# EAGLE board Logic (EAGLE 7.1.0)
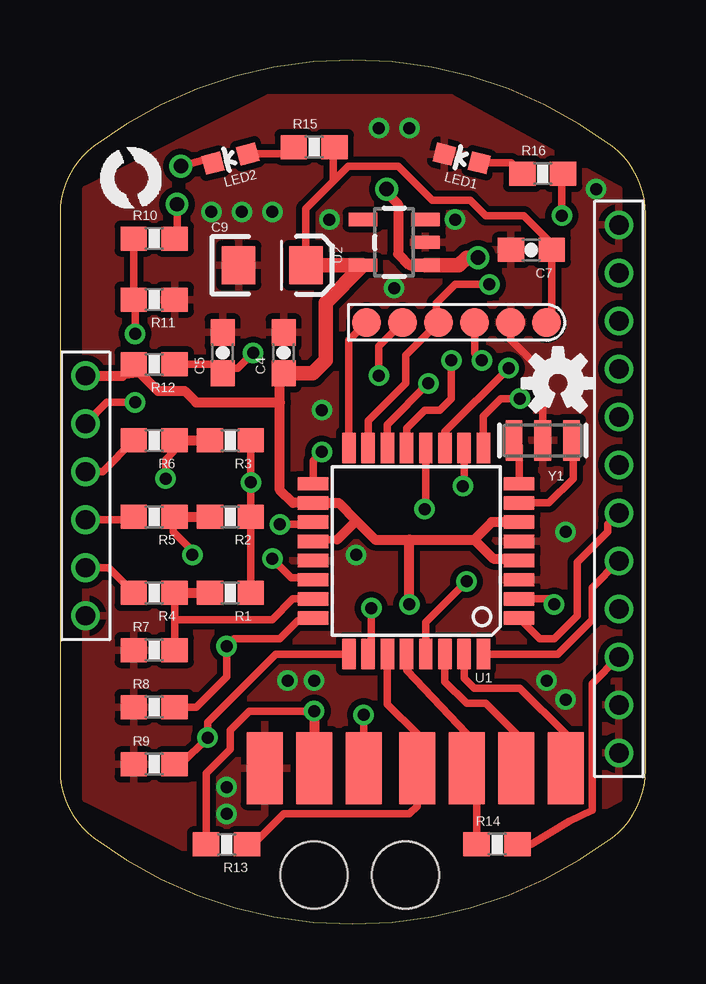
[diagram p0: board, top side]
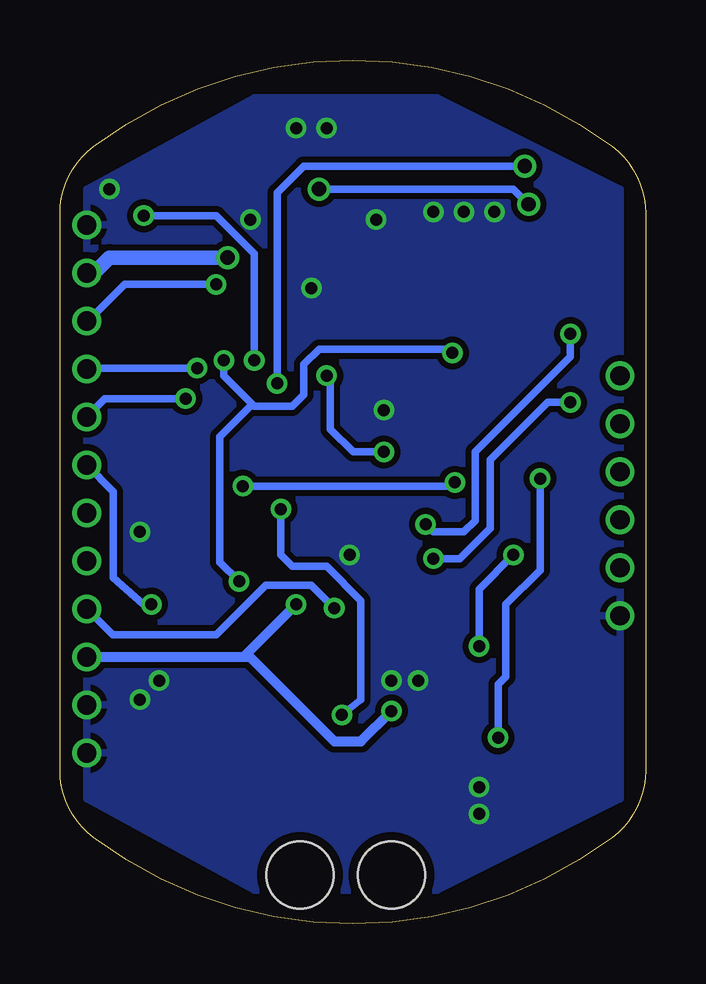
[diagram p1: board, bottom side, seen from below]

Size 24.4 x 36 mm. Coordinates in mm from the lower left corner, seen from the top.
Outline: 23,32.4 arc74 1.4,32.4 arc53 0,29.6 0,6.4 arc53 1.4,3.6 arc74 23,3.6 arc53 24.4,6.4 24.4,29.6 arc53 23,32.4
Copper layers (1*16): Top 0.0356mm / dielectric 1.5011mm / Bottom 0.0356mm
Design rules "OSH-Park": minimum track width 6mil, minimum drill 13mil, track to track 6mil, track to pad 6mil, pad to pad 6mil, via to via 6mil, smd to smd 6mil, copper to edge 15mil, drill to drill 6mil, minimum pad ring 7mil, minimum via ring 7mil, stop-mask expansion 3mil, vias tented up to drill 0mil, thermal gap 10mil
Holes 2.8 mm at 10.59,2.05 14.4,2.05

## Footprints (pad centres in the part's own frame; a part is rotated, then mirrored left to right if it is on the bottom)
0603-CAP = smd 1.1 x 1: 1 -0.85,0; 2 0.85,0
EIA3216 = smd 1.4 x 1.6: A 1.4,0; C -1.4,0
LED-0603 = smd 0.8 x 0.8: A 0,-0.75; C 0,0.75
0603-RES = smd 1.1 x 1: 1 -0.85,0; 2 0.85,0
TQFP32-08 = smd 1.27 x 0.559: 1 -4.293,2.8; 2 -4.293,2; 3 -4.293,1.2; 4 -4.293,0.4; 5 -4.293,-0.4; 6 -4.293,-1.2; 7 -4.293,-2; 8 -4.293,-2.8; 17 4.293,-2.8; 18 4.293,-2; 19 4.293,-1.2; 20 4.293,-0.4; 21 4.293,0.4; 22 4.293,1.2; 23 4.293,2; 24 4.293,2.8 | smd 0.559 x 1.27: 9 -2.8,-4.293; 10 -2,-4.293; 11 -1.2,-4.293; 12 -0.4,-4.293; 13 0.4,-4.293; 14 1.2,-4.293; 15 2,-4.293; 16 2.8,-4.293; 25 2.8,4.293; 26 2,4.293; 27 1.2,4.293; 28 0.4,4.293; 29 -0.4,4.293; 30 -1.2,4.293; 31 -2,4.293; 32 -2.8,4.293
SOT23-5 = smd 0.55 x 1.2: 1 -0.95,-1.3; 2 0,-1.3; 3 0.95,-1.3; 4 0.95,1.3; 5 -0.95,1.3
PAD-1.5X3MM = smd 3 x 1.5: P$1 0,0
AVR-ISP-TINY = smd 1.2 x 1.2: GND 1.5,0; MISO 7.5,0; MOSI 4.5,0; RESET 3,0; SCK 6,0; VCC 0,0
HEADER-2MM-6POS = drill 0.8: P$1 0,0; P$2 2,0; P$3 4,0; P$4 6,0; P$5 8,0; P$6 10,0
HEADER-2MM-12POS = drill 0.8: P$1 0,0; P$2 2,0; P$3 4,0; P$4 6,0; P$5 8,0; P$6 10,0; P$7 12,0; P$8 14,0; P$9 16,0; P$10 18,0; P$11 20,0; P$12 22,0
RESONATOR-SMD = smd 0.7 x 1.7: 1 -1.2,0; 2 0,0; 3 1.2,0

## Placement (x,y rotation side)
C4  0.1uF  [0603-CAP]  9.32,23.8 90 top
C5  0.1uF  [0603-CAP]  6.78,23.8 90 top
C7  0.1uF  [0603-CAP]  19.64,28.08 180 top
C9  1uF  [EIA3216]  8.85,27.45 0 top
LED1  RED  [LED-0603]  16.74,31.9 76 top
LED2  BLUE  [LED-0603]  7.1,31.89 105 top
LOGO1  OSHW-LOGOS  [OSHW-LOGO-S]  20.75,22.53 0 top
R1  47K  [0603-RES]  7.1,13.8 180 top
R2  47K  [0603-RES]  7.1,16.97 180 top
R3  47K  [0603-RES]  7.1,20.15 180 top
R4  47K  [0603-RES]  3.92,13.8 180 top
R5  47K  [0603-RES]  3.92,16.97 180 top
R6  47K  [0603-RES]  3.92,20.15 180 top
R7  4.7K  [0603-RES]  3.92,11.41 0 top
R8  4.7K  [0603-RES]  3.92,9.03 0 top
R9  4.7K  [0603-RES]  3.92,6.65 0 top
R10  18K 1%  [0603-RES]  3.92,28.56 0 top
R11  3.3K 1%  [0603-RES]  3.92,26.02 180 top
R12  10K  [0603-RES]  3.92,23.32 180 top
R13  10K  [0603-RES]  6.94,3.32 180 top
R14  10K  [0603-RES]  18.21,3.32 0 top
R15  330  [0603-RES]  10.59,32.37 0 top
R16  330  [0603-RES]  20.12,31.26 0 top
U1  ATMEGA168  [TQFP32-08]  14.84,15.54 180 top
U2  V_REG_LDOSMD  [SOT23-5]  13.92,28.4 90 top
U$3  PAD1.5X3MM  [PAD-1.5X3MM]  8.53,6.49 90 top
U$4  LOGOBR-LOGO-S  [BR-LOGO-SMALL]  1.7,29.83 0 top
U$8  PAD1.5X3MM  [PAD-1.5X3MM]  10.59,6.49 90 top
U$9  PAD1.5X3MM  [PAD-1.5X3MM]  14.88,6.49 90 top
U$10  PAD1.5X3MM  [PAD-1.5X3MM]  16.94,6.49 90 top
U$11  PAD1.5X3MM  [PAD-1.5X3MM]  12.65,6.49 90 top
U$12  PAD1.5X3MM  [PAD-1.5X3MM]  19.01,6.49 90 top
U$13  PAD1.5X3MM  [PAD-1.5X3MM]  21.07,6.49 90 top
U$14  AVR-ISPTINY-SMD  [AVR-ISP-TINY]  20.27,25.07 180 top
U$16  HEADER-62MM  [HEADER-2MM-6POS]  1.07,12.84 90 top
U$17  HEADER-122MM  [HEADER-2MM-12POS]  23.29,7.13 90 top
Y1  RESONATORSMD  [RESONATOR-SMD]  20.12,20.15 180 top

## Library data of the parts
C4 C5 C7 C9 = SparkFun-Capacitors
LED1 LED2 R15 R16 Y1 = SparkFun
LOGO1 = SparkFun-Aesthetics
R1-R14 = SparkFun-Resistors
U1 = SparkFun-DigitalIC
U2 = SparkFun-PowerIC
U$3 U$4 U$8-U$14 U$16 U$17 = BR-Eagle-Library

## Nets
CENTER: R1.1 R2.1 R3.1 U1.10
CURRENT_ADC: U1.26 U$17.P$4
GND: C4.2 C5.2 C7.2 C9.C LED1.C R7.1 R8.1 R9.1 R11.1 U1.3 U1.5 U1.21 U2.2 U$3.P$1 U$14.GND U$16.P$1 U$17.P$1 U$17.P$2 U$17.P$12 Y1.2
LED_STATUS: LED2.C U1.14
LED_WARN: R16.2 U1.13
MISO: U1.16 U$14.MISO
N$3: LED1.A R16.1
N$10: U1.7 Y1.1
N$11: U1.8 Y1.3
N$16: LED2.A R15.1
PHASE_A: R4.2 U$16.P$2
PHASE_B: R5.2 U$16.P$3
PHASE_C: R6.2 U$16.P$4
PWM: U1.12 U$11.P$1
PWM_AH: U1.32 U$17.P$5
PWM_AL: U1.1 U$17.P$6
PWM_BH: U1.2 U$17.P$7
PWM_BL: U1.9 U$17.P$8
PWM_CH: U1.11 U$17.P$9
PWM_CL: U1.15 U$14.MOSI U$17.P$10
RESET: C5.1 R12.1 U1.29 U$14.RESET
RX: U1.30 U$12.P$1
SCK: U1.17 U$14.SCK
SCL: R14.1 U1.28 U$10.P$1
SDA: R13.1 U1.27 U$9.P$1
SENSE_A: R1.2 R4.1 R7.2 U1.23
SENSE_B: R2.2 R5.1 R8.2 U1.24
SENSE_C: R3.2 R6.1 R9.2 U1.25
TEMP_ADC: U1.22 U$16.P$5
TX: U1.31 U$13.P$1
VBAT: R10.2 U2.1 U$17.P$11
VBAT_ADC: R10.1 R11.2 U1.19
VCC5V: C4.1 C7.1 C9.A R12.2 R13.2 R14.2 R15.2 U1.4 U1.6 U1.18 U1.20 U2.5 U$8.P$1 U$14.VCC U$16.P$6 U$17.P$3

## Tracks (layer width: path | path; a pad name or v marks a point on that pad's centre or on a via)
CENTER  (via drill 0.5)
  Top 0.305: R1.1 R2.1 v7.95,18.4 7.95,18.88 R3.1 | U1.10 16.84,18.3 v16.78,18.24
  Bottom 0.305: v16.78,18.24 8.11,18.24 v7.95,18.4
CURRENT_ADC  (via drill 0.5)
  Top 0.305: v12.97,13.16 12.97,11.38 U1.26
  Bottom 0.305: 13.01,13.13 v12.97,13.16 13.93,14.11 15.83,14.11 17.89,12.05 22.21,12.05 U$17.P$4
GND  (via drill 0.5)
  Top 0.305: U$14.GND 18.78,24.34 20.12,23 Y1.2
  other vias: 12.34,15.38 21.07,16.34 20.27,10.14 21.07,9.35 8.85,29.67 7.58,29.67 6.3,29.67 13.29,33.16 14.56,33.16 13.92,26.5 11.23,29.35 10.59,10.14 9.48,10.14 22.34,30.62 10.91,21.42 6.94,5.7 6.94,4.59 16.46,29.35
  pour Top (isolate 0.254): 1.07,5.22 1.07,30.62 8.69,34.43 16.31,34.43 23.29,30.62 23.29,5.22 16.31,1.41 8.69,1.41
  pour Bottom (isolate 0.254): 1.07,5.22 1.07,30.62 8.69,34.43 16.31,34.43 23.29,30.62 23.29,5.22 16.31,1.41 8.69,1.41
LED_STATUS  (via drill 0.5, 0.6)
  Top 0.305: U1.14 13.64,20.81 v15.35,22.53 | v5.04,31.58 6.18,31.89 LED2.C
  Bottom 0.305: v15.35,22.53 15.35,30.46 14.24,31.58 v5.04,31.58
LED_WARN  (via drill 0.5)
  Top 0.305: U1.13 14.44,20.66 15.2,21.42 15.83,21.42 16.31,21.89 v16.31,23.48 | v20.91,29.51 20.91,31.2 R16.2
  Bottom 0.305: v16.31,23.48 16.31,27.92 17.89,29.51 v20.91,29.51
MISO
  Top 0.305: U1.16 12.04,24.33 U$14.MISO
N$3
  Top 0.305: LED1.A 18.81,31.72 R16.1
N$10
  Top 0.305: U1.7 20.37,17.54 21.39,18.56 21.39,20.08 Y1.1
N$11
  Top 0.305: U1.8 19.13,19.93 Y1.3
N$16
  Top 0.305: LED2.A 9.46,32.09 R15.1
PHASE_A
  Top 0.305: U$16.P$2 2.03,14.84 R4.2
PHASE_B
  Top 0.305: U$16.P$3 2.95,16.84
  Top 0.406: 2.95,16.84 R5.2
PHASE_C
  Top 0.305: U$16.P$4 1.77,18.84 R6.2
PWM  (via drill 0.5)
  Top 0.305: U1.12 15.24,17.33 v15.2,17.29 | v12.66,8.72 U$11.P$1
  Bottom 0.305: v15.2,17.29 15.2,15.38 14.72,14.91 13.29,14.91 11.86,13.48 11.86,9.35 v12.66,8.72
PWM_AH
  Top 0.305: U1.32 20.75,11.25 22.18,12.68 22.18,14.02 U$17.P$5
PWM_AL
  Top 0.305: U$17.P$6 22.82,16.65 22.82,16.34 21.55,15.07 21.55,12.84 20.59,11.89 19.98,11.89 U1.1
PWM_BH  (via drill 0.5)
  Top 0.305: U1.2 20.5,13.54 v20.59,13.32
  Bottom 0.305: v20.59,13.32 20.75,13.16 22.18,14.43 22.18,18.02 U$17.P$7
PWM_BL  (via drill 0.5)
  Top 0.305: U1.9 17.64,21.16 18.37,21.89 v19.16,21.89
  Bottom 0.305: v19.16,21.89 22.53,21.89 U$17.P$8
PWM_CH  (via drill 0.5)
  Top 0.305: U1.11 16.04,20.51 v18.69,23.16
  Bottom 0.305: v18.69,23.16 23.01,23.16 U$17.P$9
PWM_CL  (via drill 0.5)
  Top 0.305: U1.15 12.84,20.96 14.4,22.53 14.4,23.69 U$14.MOSI 15.67,25.17 15.67,25.86 16.47,26.65 v17.89,26.65
  Bottom 0.305: U$17.P$10 23.23,25.13 21.7,26.65 v17.89,26.65
RESET  (via drill 0.5)
  Top 0.305: R12.1 6.41,23.32 C5.1 7,23.16 7.42,23.16 v8.05,23.8 | U$14.RESET 17.28,23.78 v17.58,23.48 | U1.29 15.24,12.57 v16.94,14.27
  Bottom 0.305: v17.58,23.48 17.58,22.84 16.39,21.65 | 16.39,21.65 16.31,21.57 14.72,21.57 14.24,22.05 14.24,23.32 13.61,23.96 8.21,23.96 v8.05,23.8 | v16.94,14.27 17.74,15.07 17.74,20.3 16.39,21.65
RX
  Top 0.305: U1.30 16.04,10.09 16.94,9.19 17.74,9.19 19.01,7.92 U$12.P$1
SCK  (via drill 0.5)
  Top 0.305: U1.17 10.55,19.31 v10.91,19.67 | v13.29,22.84 13.29,24.08 U$14.SCK
  Bottom 0.305: v10.91,19.67 12.18,19.67 13.13,20.62 13.13,22.69 v13.29,22.84
SCL
  Top 0.305: U1.28 14.44,10.58 16.94,7.92 U$10.P$1 17.36,6.07 R14.1
SDA
  Top 0.305: U1.27 13.64,9.16 14.88,7.92 U$9.P$1 14.88,4.91 14.56,4.59 9.32,4.59 8.05,3.32 R13.1
SENSE_A
  Top 0.305: R7.2 4.77,12.68 | 4.77,12.68 R4.1 | U1.23 9.7,13.54 8.85,12.68 4.77,12.68
  Top 0.406: R4.1 R1.2
SENSE_B  (via drill 0.5)
  Top 0.305: R8.2 5.67,9.03 6.94,10.3 v6.94,11.57 7.26,11.89 9.16,11.89 9.91,12.64 U1.24 | v5.51,15.38 5.51,15.54 4.72,16.34 4.72,16.91 R5.1
  Top 0.406: R5.1 R2.2
  Bottom 0.305: v6.94,11.57 6.94,13.95 v5.51,15.38
SENSE_C  (via drill 0.5)
  Top 0.305: 5.04,6.65 v6.15,7.76 6.15,8.4 9,11.25 U1.25 | v4.4,18.56 4.4,19.35 4.72,19.67 4.72,20.09 R6.1
  Top 0.406: R6.1 R3.2 | R9.2 5.04,6.65
  Bottom 0.305: v6.15,7.76 6.15,9.99 5.83,10.3 5.83,13.32 4.4,14.75 v4.4,18.56
TEMP_ADC  (via drill 0.5)
  Top 0.305: v8.85,15.22 9.64,14.43 10.46,14.43 U1.22 | v3.13,21.73 1.96,21.73 U$16.P$5
  Bottom 0.305: v8.85,15.22 7.73,15.22 6.46,16.49 6.46,19.35 4.08,21.73 v3.13,21.73
TX
  Top 0.305: U1.31 16.84,10.25 17.26,9.83 19.16,9.83 21.07,7.92 U$13.P$1
VBAT  (via drill 0.6)
  Top 0.305: v4.88,29.99 4.88,28.66 R10.2
  Top 0.406: v13.61,30.62 13.61,30.46 14.08,29.99 14.08,27.92 14.56,27.45 U2.1
  Top 0.61: v17.42,27.77 16.94,27.77 16.62,27.45 U2.1
  Bottom 0.305: v13.61,30.62 5.51,30.62 v4.88,29.99
  Bottom 0.61: U$17.P$11 22.98,27.13 22.34,27.77 v17.42,27.77
VBAT_ADC  (via drill 0.5)
  Top 0.305: v9.16,16.65 10.46,16.65 U1.19 | R10.1 R11.2 3.13,25.96 v3.13,24.59
  Bottom 0.305: v9.16,16.65 8.85,16.34 7.58,16.34 7.1,16.81 7.1,19.67 3.13,23.64 v3.13,24.59
VCC5V  (via drill 0.5)
  Top 0.305: U$14.VCC 20.49,25.28 C7.1 20.49,28.34 19.32,29.51 17.74,29.51 17.1,30.15 15.51,30.15 14.08,31.58 12.02,31.58 11.39,30.94 | 9.16,22.79 C4.1 | 2.6,22.84 3.34,22.95 R12.2 | 11.54,16.02 10.62,16.02 U1.20 | 19.05,15.22 U1.4 | C9.A 10.25,29.8 11.39,30.94 | 11.39,30.94 11.39,32.31 R15.2 | R14.2 19.64,3.32 21.23,4.27 22.18,4.75 22.18,10.02 U$17.P$3 | R13.2 6.09,6.28 7.1,7.29 7.1,8.08 7.89,8.87 v10.59,8.87
  Top 0.406: 9.16,21.73 9.16,18.08 9.7,17.54 U1.18 11.61,17.54 12.34,16.81 | 9.16,21.73 9.16,22.79 | U$16.P$6 2.6,22.84 | 3.34,22.95 4.08,22.21 5.19,22.21 5.67,21.73 9.16,21.73 | 12.34,16.81 11.54,16.02 | U1.6 17.98,16.74 17.26,16.02 | 19.05,15.22 18.05,15.22 17.26,16.02 | 12.34,16.81 13.13,16.02 14.56,16.02 | 14.56,16.02 17.26,16.02 | v14.56,13.32 14.56,16.02 | v10.59,8.87 U$8.P$1
  Top 0.61: C9.A U2.5 11.07,25.89 11.07,23.48 10.54,22.95 C4.1
  Bottom 0.406: U$17.P$3 16.75,11.13 | 16.75,11.13 v14.56,13.32 | 16.75,11.13 16.5,11.13 12.97,7.6 11.86,7.6 v10.59,8.87

## Text on the board
tDocu: BLUESC-ELEC-LOGIC-XA | GND | SDA | SCL | RX | TX | 5V | PWM | - | +
bDocu: 9/14 | Designed by R.J. | BlueRobotics